# Altium PCB higgsant.PcbDoc
Units mil, origin at the board's own origin, x right, y up, seen from the top; angles counter-clockwise.
Board outline 7874.02 x 7874.02 mil, 2 copper layers (Top Layer, Bottom Layer), stack 47.8 mil thick; 12 components, 2 nets, 20 pads, 0 vias.
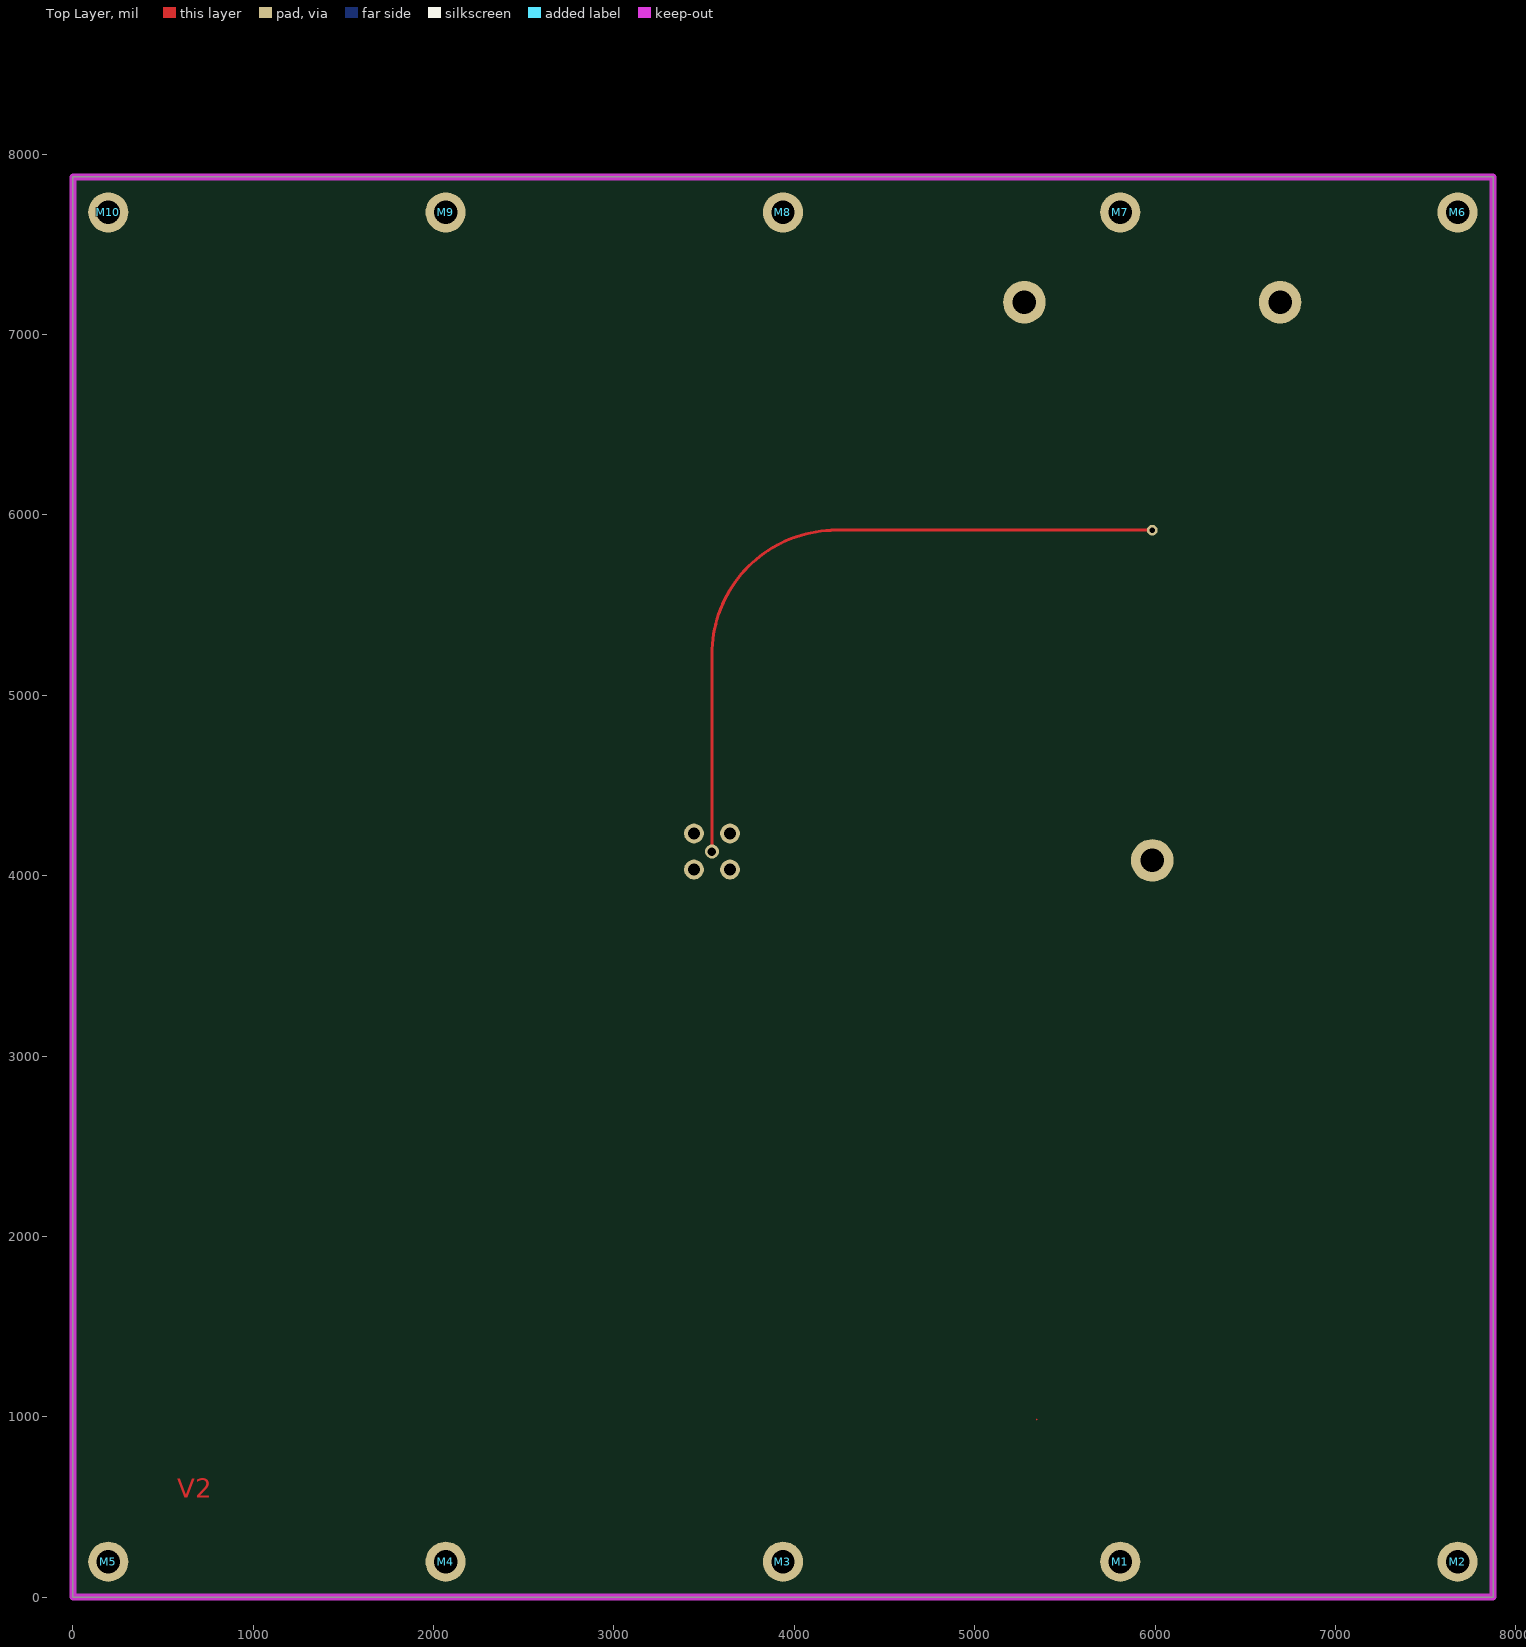
[diagram p0: Top Layer view]
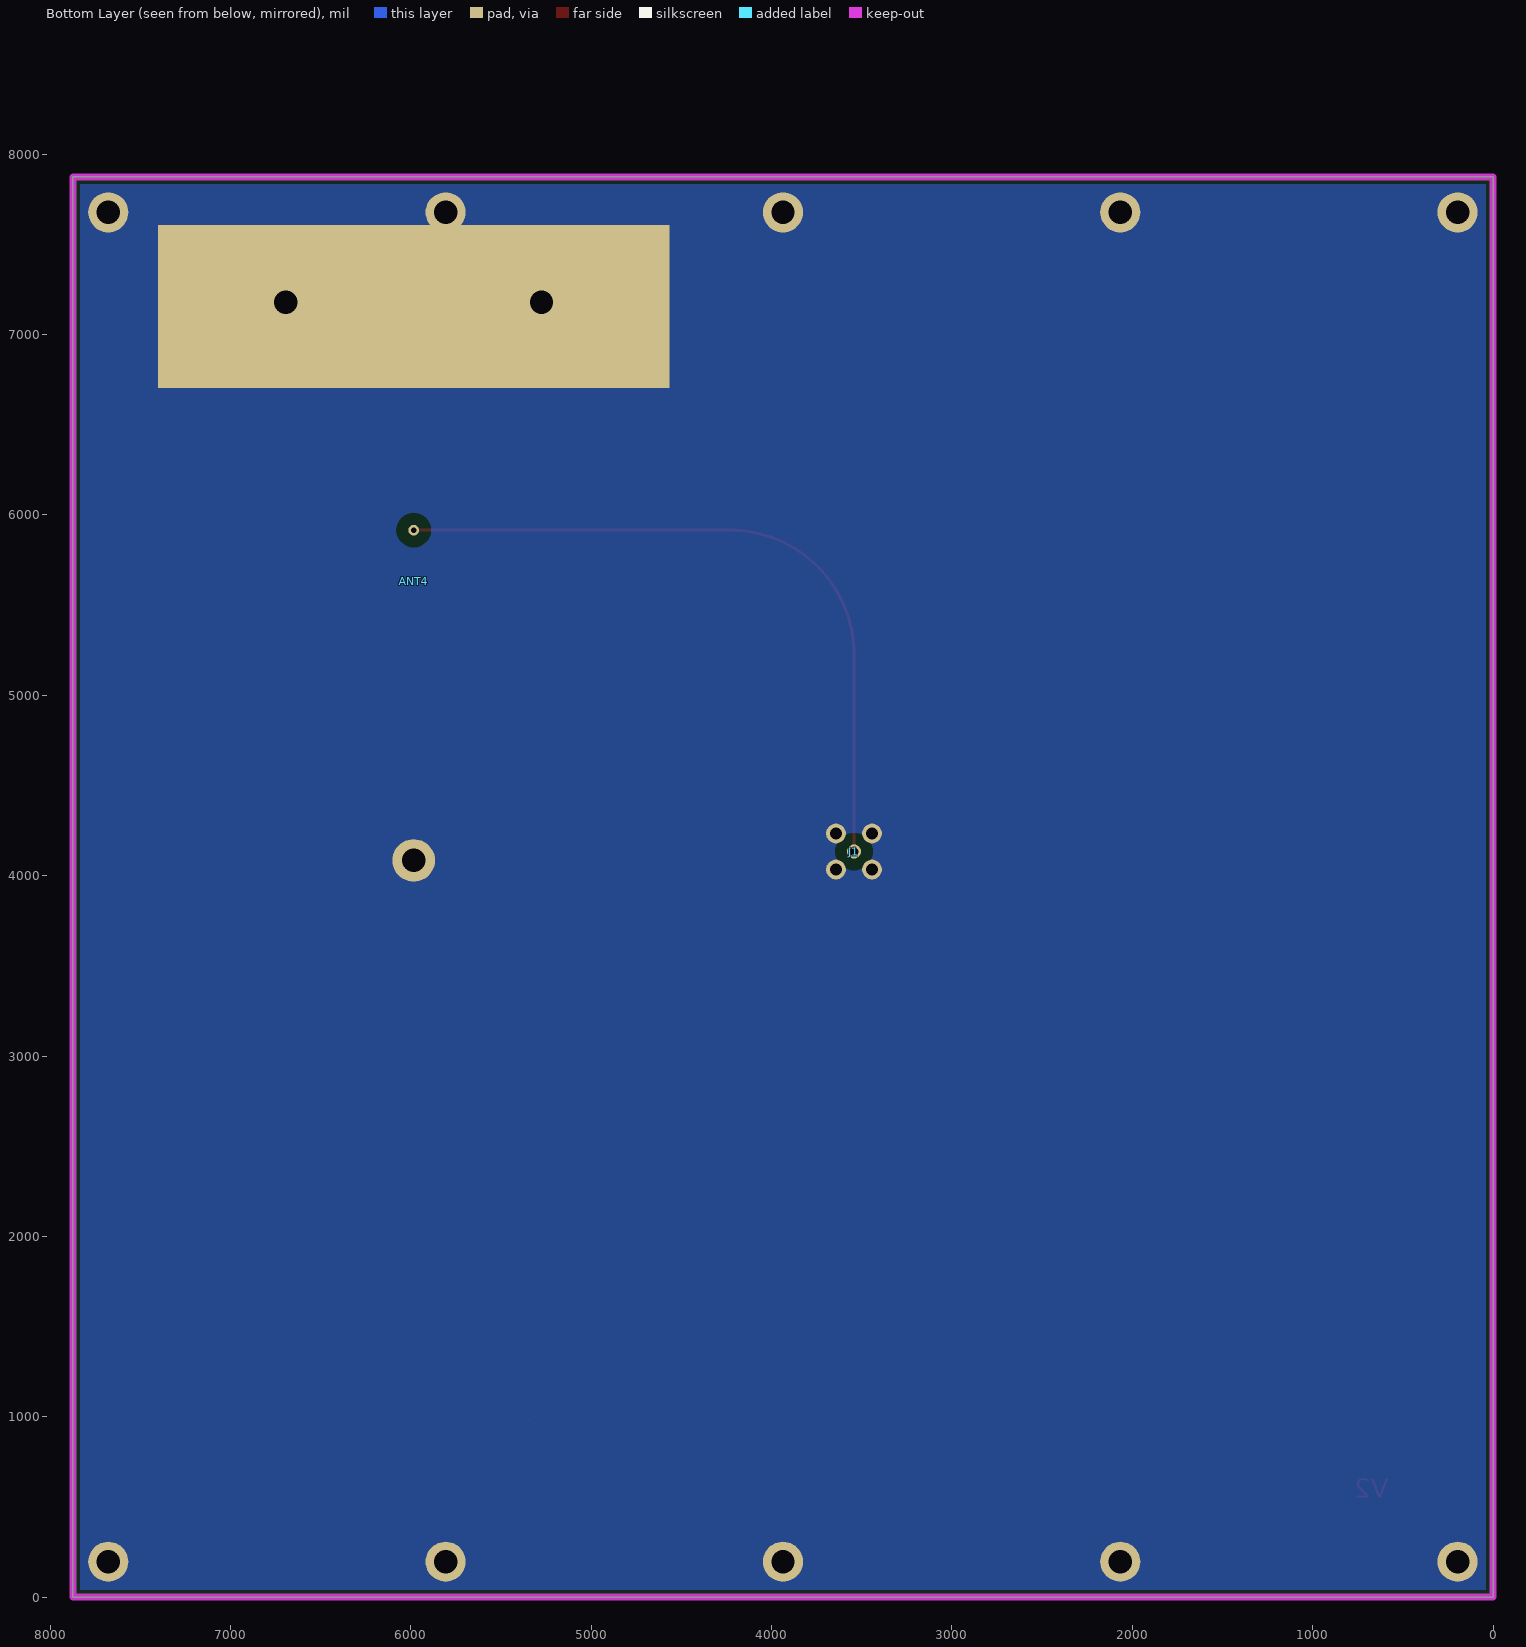
[diagram p1: Bottom Layer view, seen from below]

## Layer stack, top to bottom
Top Solder: solder mask 0.4, Solder Resist, Dk 3.5
Top Layer: signal copper 1.4
Dielectric1: core 45, FR-4, Dk 4.8
Bottom Layer: signal copper 1.4
Bottom Solder: solder mask 0.4, Solder Resist, Dk 3.5

## Board outline
0,0 7874.02,0 7874.02,7874.02 0,7874.02

## Design rules (kind name [scope] priority, off if disabled: settings)
Clearance "Stitching NetANT2_2" [IsStitchingVia and InNet('NetANT2_2') vs (IsVia and (Not IsStitchingVia)) Or IsPad] p1: gap=98.43 ignorepadtopadclearanceinfootprint=FALSE
Clearance [All] p2: gap=20 ignorepadtopadclearanceinfootprint=FALSE except(0: Arc-Text Track-Text SMDPad-Text THPad-Text Via-Text Fill-Text Poly-Text Region-Text Text-Text; 80: Fill-Hole Poly-Hole Region-Hole)
ComponentClearance [All] p1 off: gap=10 collisioncheckmode=3 verticalgap=10 showdistances=FALSE
HoleSize [All] p1: absolutevalues=TRUE maxlimit=1000 minlimit=10 maxpercent=80.000 minpercent=20.000
PlaneConnect [All] p1: planeconnectstyle=Direct reliefexpansion=20 reliefentries=4 reliefconductorwidth=10 reliefairgap=10
PolygonConnect [All] p1: connectstyle=Direct reliefconductorwidth=10 reliefentries=4 polygonreliefangle="90 Angle" airgapwidth=10
RoutingVias [All] p1: holewidth=28 width=50 viastyle="Through Hole" minholewidth=28 minwidth=50 maxholewidth=28 maxwidth=50
SilkToSolderMaskClearance SilkscreenOverComponentPads [IsPad] p1: minsilkscreentomaskgap=10 clearancetoexposedcopper=TRUE
SolderMaskExpansion [All] p1: expansion=4
Width [All] p1: maxlimit=19685.04 minlimit=3.5 preferedwidth=3.5
26 further rules are at their usual default settings.

## Components (designator, comment, footprint, x,y, rotation, side; value= is the part's Value field where it differs from the comment)
ANT4 "antenna_plane" antenna_plane 5984.25,5748.03 r90 bottom
J1 "142146" 142146 3543.31,4133.86 r0 bottom
M1 "MOUNT" MOUNTM3 5807.09,196.85 r0 top
M2 "MOUNT" MOUNTM3 7677.17,196.85 r0 top
M3 "MOUNT" MOUNTM3 3937.01,196.85 r0 top
M4 "MOUNT" MOUNTM3 2066.93,196.85 r0 top
M5 "MOUNT" MOUNTM3 196.85,196.85 r0 top
M6 "MOUNT" MOUNTM3 7677.17,7677.17 r0 top
M7 "MOUNT" MOUNTM3 5807.09,7677.17 r0 top
M8 "MOUNT" MOUNTM3 3937.01,7677.17 r0 top
M9 "MOUNT" MOUNTM3 2066.93,7677.17 r0 top
M10 "MOUNT" MOUNTM3 196.85,7677.17 r0 top

## Footprints (in the part's own frame and the unit in brackets; to place one, negate y for a bottom-side part, rotate by r counter-clockwise, add the part's x,y. Pads: shape width x height; smd on the part's side, far side on the other; paste and mask are expansions set on the pad)
142146 [mm] "Connector; RF Coaxial, SMB, Thru-Hole; 5 Position; Right-Angle"
  round 2 / inner round 0 / far side round 2 hole 1.2: 1(0,0)
  round 2.8 hole 1.7: 2(-2.54,-2.54) 3(2.54,-2.54) 4(2.54,2.54) 5(-2.54,2.54)
  body extent -10.6,-3.5 3.5,3.5, height 9.06
antenna_plane [mm] "sheetmetal antenna plane"
  round 6 hole 3.3 paste-1.5: 1(-42.25,0) 1(36.35,-18)
  rect 23x72 smd paste-11.5: 1(35.75,0)
  round 6 hole 3.3 paste-1.5 mask+3: 1(36.35,18)
  round 1.524 / inner round 0 / far side round 1.524 hole 0.762: 2(4.25,0)
  body extent -47.25,-36 47.25,36, height 10.9
MOUNTM3 [mm] "M3 Mounting Hole"
  round 5.65 hole 3.3: 1(0,0)

## Part data
ANT4: Manufacturer=Siglabs, Manufacturer P/N=antenna_plane
J1: library part COAX-F, "Connector; RF Coaxial, SMB, Thru-Hole; 5 Position; Right-Angle", Manufacturer="Amphenol RF", Manufacturer P/N=142146
M1 M2 M3 M4 M5 M6 M7 M8 M9 M10: "M3 Standard Fit Hole"

## Nets (pads, with @x,y where several pads share a name; then routed paths per layer and width w, separated by ;. In a path a pad name is that pad's centre, name@x,y a point inside that pad or via, vN(x,y) a via of type N, cw(c..) or ccw(c..) an arc to the next point about the centre after c; other vN are vias at no path point)
GND: ANT4.1 J1.2 J1.3 J1.4 J1.5 M1.1 M2.1 M3.1 M4.1 M5.1 M6.1 M7.1 M8.1 M9.1 M10.1
NetANT4_2: ANT4.2 J1.1 | length 3926.8
  Top Layer w17: J1.1 3543.31,5226.55 cw(c4232.11,5226.55) 4232.11,5915.35 ANT4.2
copper on no net: | length 2.9
  Top Layer w8.75: 5344.49,984.25 5344.49,987.13

## Polygon pours and split planes (outlines as drawn)
no net on Mechanical 16 "NONET_L-01_P-001" (solid): 2854.72,-1103.22 2861.72,-1093.6 2866.97,-1083.97 2871.35,-1073.47 2874.85,-1062.97 2877.47,-1051.6 2878.35,-1040.22 2879.22,-1027.97 2878.35,-1015.72 2877.47,-1003.47 2874.85,-992.1 2871.35,-980.72 2866.97,-971.1 2861.72,-961.47 2855.6,-951.85 2848.6,-943.1 2840.72,-935.22 2832.85,-929.1 2824.1,-922.97 2814.47,-918.6 2805.72,-915.1 2795.22,-912.47 2784.72,-910.72 2764.6,-910.72 2754.97,-912.47 2745.35,-914.22 2736.6,-917.72 2727.85,-922.1 2719.97,-927.35 2712.1,-933.47 2704.22,-940.47 2704.22,-915.97 2648.22,-915.97 2648.22,-1139.1 2704.22,-1139.1 2704.22,-1115.47 2712.1,-1122.47 2720.85,-1129.47 2728.72,-1133.85 2737.47,-1138.22 2745.35,-1140.85 2754.1,-1143.47 2763.72,-1144.35 2772.47,-1145.22 2783.85,-1144.35 2793.47,-1142.6 2803.97,-1139.97 2812.72,-1136.47 2822.35,-1132.1 2831.1,-1125.97 2839.85,-1118.97 2847.72,-1111.1
no net on Mechanical 16 "NONET_L-01_P-001" (solid): 2901.97,-1338.6 2905.47,-1334.22 2908.1,-1328.97 2910.72,-1324.6 2912.47,-1319.35 2914.22,-1314.1 2914.22,-1307.97 2915.1,-1302.72 2914.22,-1295.72 2913.35,-1290.47 2912.47,-1284.35 2909.85,-1279.1 2907.22,-1273.85 2904.6,-1268.6 2900.22,-1264.22 2895.85,-1259.85 2887.97,-1253.72 2878.35,-1248.47 2868.72,-1245.85 2858.22,-1244.97 2851.22,-1245.85 2843.35,-1246.72 2836.35,-1249.35 2829.35,-1252.85 2823.22,-1257.22 2817.1,-1261.6 2812.72,-1267.72 2808.35,-1273.85 2804.85,-1280.85 2803.1,-1287.85 2801.35,-1294.85 2800.47,-1301.85 2801.35,-1309.72 2803.1,-1316.72 2804.85,-1323.72 2808.35,-1330.72 2812.72,-1337.72 2817.1,-1342.97 2823.22,-1347.35 2829.35,-1351.72 2836.35,-1355.22 2843.35,-1357.85 2850.35,-1358.72 2858.22,-1359.6 2864.35,-1359.6 2869.6,-1358.72 2874.85,-1356.97 2880.1,-1355.22 2885.35,-1352.6 2889.72,-1349.97 2894.1,-1346.47 2898.47,-1342.97
no net on Mechanical 16 "NONET_L-01_P-001" (solid): 3099.72,-1338.6 3102.35,-1334.22 3104.97,-1329.85 3107.6,-1324.6 3109.35,-1319.35 3110.22,-1314.1 3111.1,-1302.72 3110.22,-1290.47 3107.6,-1279.97 3104.97,-1274.72 3103.22,-1269.47 3099.72,-1265.1 3096.22,-1261.6 3088.35,-1253.72 3083.97,-1251.1 3079.6,-1249.35 3075.22,-1247.6 3069.97,-1245.85 3060.35,-1244.97 3050.72,-1245.85 3041.97,-1248.47 3033.22,-1253.72 3026.22,-1259.85 3026.22,-1247.6 2998.22,-1247.6 2998.22,-1356.97 3026.22,-1356.97 3026.22,-1345.6 3034.1,-1351.72 3041.97,-1356.1 3050.72,-1358.72 3059.47,-1359.6 3064.72,-1359.6 3069.1,-1358.72 3074.35,-1356.97 3078.72,-1355.22 3083.1,-1353.47 3087.47,-1349.97 3096.22,-1342.97
no net on Mechanical 16 "NONET_L-01_P-001" (solid): 3295.72,-1338.6 3298.35,-1334.22 3301.85,-1328.97 3303.6,-1324.6 3305.35,-1319.35 3307.1,-1314.1 3307.97,-1307.97 3307.97,-1295.72 3307.1,-1290.47 3305.35,-1284.35 3303.6,-1279.1 3300.97,-1273.85 3297.47,-1268.6 3293.97,-1264.22 3289.6,-1259.85 3280.85,-1253.72 3272.1,-1248.47 3261.6,-1245.85 3251.97,-1244.97 3244.1,-1245.85 3237.1,-1246.72 3229.22,-1249.35 3223.1,-1252.85 3216.1,-1257.22 3210.85,-1261.6 3205.6,-1267.72 3201.22,-1273.85 3198.6,-1280.85 3195.97,-1287.85 3194.22,-1294.85 3194.22,-1309.72 3195.97,-1316.72 3198.6,-1323.72 3201.22,-1330.72 3205.6,-1337.72 3210.85,-1342.97 3216.1,-1347.35 3222.22,-1351.72 3229.22,-1355.22 3236.22,-1357.85 3244.1,-1358.72 3251.97,-1359.6 3257.22,-1359.6 3262.47,-1358.72 3267.72,-1356.97 3272.97,-1355.22 3278.22,-1352.6 3282.6,-1349.97 3286.97,-1346.47 3291.35,-1342.97
no net on Mechanical 16 "NONET_L-01_P-001" (solid): 3411.22,-1356.97 3411.22,-1345.6 3402.47,-1351.72 3394.6,-1356.1 3386.72,-1358.72 3377.1,-1359.6 3371.85,-1359.6 3366.6,-1358.72 3362.22,-1356.97 3357.85,-1355.22 3353.47,-1353.47 3349.1,-1349.97 3340.35,-1342.97 3336.85,-1338.6 3334.22,-1334.22 3331.6,-1329.85 3328.97,-1324.6 3327.22,-1319.35 3326.35,-1314.1 3325.47,-1302.72 3326.35,-1290.47 3328.97,-1279.97 3330.72,-1274.72 3333.35,-1269.47 3336.85,-1265.1 3340.35,-1261.6 3348.22,-1253.72 3352.6,-1251.1 3356.97,-1249.35 3361.35,-1247.6 3366.6,-1245.85 3376.22,-1244.97 3385.85,-1245.85 3394.6,-1248.47 3403.35,-1253.72 3411.22,-1259.85 3411.22,-1205.6 3437.47,-1205.6 3437.47,-1356.97
no net on Mechanical 16 "NONET_L-01_P-001" (solid): 3566.1,-1338.6 3569.6,-1334.22 3572.22,-1329.85 3573.97,-1324.6 3575.72,-1319.35 3577.47,-1314.1 3578.35,-1302.72 3577.47,-1290.47 3573.97,-1279.97 3572.22,-1274.72 3569.6,-1269.47 3566.97,-1265.1 3563.47,-1261.6 3555.6,-1253.72 3551.22,-1251.1 3546.85,-1249.35 3542.47,-1247.6 3537.22,-1245.85 3526.72,-1244.97 3517.97,-1245.85 3508.35,-1248.47 3500.47,-1253.72 3492.6,-1259.85 3492.6,-1247.6 3465.47,-1247.6 3465.47,-1356.97 3492.6,-1356.97 3492.6,-1345.6 3500.47,-1351.72 3509.22,-1356.1 3517.1,-1358.72 3525.85,-1359.6 3531.1,-1359.6 3536.35,-1358.72 3541.6,-1356.97 3545.97,-1355.22 3550.35,-1353.47 3554.72,-1349.97 3562.6,-1342.97
no net on Mechanical 16 "NONET_L-01_P-001" (solid): 3392.85,-1186.35 3398.97,-1176.72 3404.22,-1166.22 3407.72,-1155.72 3346.47,-1155.72 3342.1,-1160.1 3336.85,-1163.6 3331.6,-1167.1 3325.47,-1169.72 3318.47,-1172.35 3311.47,-1173.22 3302.72,-1174.1 3294.85,-1174.97 3283.47,-1174.1 3273.85,-1173.22 3265.97,-1170.6 3258.1,-1167.97 3251.97,-1163.6 3246.72,-1160.1 3242.35,-1154.85 3238.85,-1149.6 3236.22,-1143.47 3234.47,-1134.72 3233.6,-1124.22 3233.6,-1111.97 3240.6,-1118.1 3248.47,-1124.22 3256.35,-1128.6 3264.22,-1132.97 3272.97,-1135.6 3281.72,-1137.35 3291.35,-1139.1 3312.35,-1139.1 3322.85,-1137.35 3332.47,-1134.72 3342.1,-1131.22 3351.72,-1126.85 3360.47,-1120.72 3369.22,-1114.6 3377.1,-1106.72 3384.1,-1098.85 3390.22,-1089.22 3395.47,-1080.47 3399.85,-1069.97 3403.35,-1059.47 3405.97,-1048.97 3407.72,-1036.72 3407.72,-1012.22 3405.97,-999.97 3403.35,-987.72 3399.85,-977.22 3394.6,-966.72 3389.35,-957.1 3382.35,-947.47 3375.35,-939.6 3367.47,-932.6 3359.6,-926.47 3350.85,-922.1 3342.1,-917.72 3333.35,-914.22 3323.72,-912.47 3314.1,-910.72 3294.85,-910.72 3285.22,-912.47 3276.47,-914.22 3267.72,-917.72 3258.97,-921.22 3250.22,-926.47 3241.47,-933.47 3233.6,-940.47 3233.6,-915.97 3177.6,-915.97 3177.6,-1120.72 3179.35,-1133.85 3181.1,-1145.22 3182.85,-1156.6 3186.35,-1166.22 3190.72,-1174.97 3195.1,-1183.72 3200.35,-1190.72 3208.22,-1198.6 3217.85,-1206.47 3227.47,-1212.6 3238.85,-1217.85 3250.22,-1221.35 3263.35,-1223.97 3277.35,-1225.72 3292.22,-1226.6 3307.97,-1225.72 3322.85,-1224.85 3335.97,-1222.22 3347.35,-1218.72 3357.85,-1213.47 3368.35,-1208.22 3377.1,-1202.1 3384.97,-1194.22
no net on Mechanical 16 "NONET_L-01_P-001" (solid): 2656.97,-1339.47 2659.6,-1335.1 2663.1,-1329.85 2664.85,-1325.47 2666.6,-1320.22 2668.35,-1314.1 2669.22,-1302.72 2668.35,-1291.35 2666.6,-1285.22 2664.85,-1279.97 2663.1,-1274.72 2660.47,-1270.35 2656.97,-1265.97 2652.6,-1261.6 2649.1,-1258.1 2644.72,-1254.6 2639.47,-1251.1 2635.1,-1249.35 2629.85,-1247.6 2624.6,-1245.85 2618.47,-1244.97 2606.22,-1244.97 2600.97,-1245.85 2594.85,-1247.6 2589.6,-1249.35 2584.35,-1251.1 2579.97,-1254.6 2575.6,-1258.1 2571.22,-1261.6 2566.85,-1265.97 2564.22,-1270.35 2561.6,-1275.6 2558.97,-1280.85 2557.22,-1286.1 2556.35,-1292.22 2555.47,-1298.35 2554.6,-1305.35 2554.6,-1310.6 2642.97,-1310.6 2641.22,-1315.85 2639.47,-1320.22 2635.97,-1324.6 2632.47,-1328.97 2628.1,-1331.6 2622.85,-1333.35 2617.6,-1335.1 2604.47,-1335.1 2597.47,-1332.47 2591.35,-1329.85 2585.22,-1324.6 2562.47,-1335.97 2566.85,-1341.22 2571.22,-1346.47 2577.35,-1349.97 2582.6,-1353.47 2588.72,-1356.1 2595.72,-1357.85 2603.6,-1358.72 2611.47,-1359.6 2617.6,-1359.6 2623.72,-1358.72 2628.97,-1356.97 2634.22,-1355.22 2639.47,-1353.47 2644.72,-1349.97 2649.1,-1347.35 2652.6,-1342.97
no net on Mechanical 16 "NONET_L-01_P-001" (solid): 9776.1,-1339.47 9773.47,-1335.1 9769.97,-1329.85 9768.22,-1325.47 9766.47,-1320.22 9764.72,-1314.1 9763.85,-1302.72 9764.72,-1291.35 9766.47,-1285.22 9768.22,-1279.97 9769.97,-1274.72 9772.6,-1270.35 9776.1,-1265.97 9780.47,-1261.6 9783.97,-1258.1 9788.35,-1254.6 9793.6,-1251.1 9797.97,-1249.35 9803.22,-1247.6 9808.47,-1245.85 9814.6,-1244.97 9826.85,-1244.97 9832.1,-1245.85 9838.22,-1247.6 9843.47,-1249.35 9848.72,-1251.1 9853.1,-1254.6 9857.47,-1258.1 9861.85,-1261.6 9866.22,-1265.97 9868.85,-1270.35 9871.47,-1275.6 9874.1,-1280.85 9875.85,-1286.1 9876.72,-1292.22 9877.6,-1298.35 9878.47,-1305.35 9878.47,-1310.6 9790.1,-1310.6 9791.85,-1315.85 9793.6,-1320.22 9797.1,-1324.6 9800.6,-1328.97 9804.97,-1331.6 9810.22,-1333.35 9815.47,-1335.1 9828.6,-1335.1 9835.6,-1332.47 9841.72,-1329.85 9847.85,-1324.6 9870.6,-1335.97 9866.22,-1341.22 9861.85,-1346.47 9855.72,-1349.97 9850.47,-1353.47 9844.35,-1356.1 9837.35,-1357.85 9829.47,-1358.72 9821.6,-1359.6 9815.47,-1359.6 9809.35,-1358.72 9804.1,-1356.97 9798.85,-1355.22 9793.6,-1353.47 9788.35,-1349.97 9783.97,-1347.35 9780.47,-1342.97
no net on Mechanical 16 "NONET_L-01_P-001" (solid): 9040.22,-1186.35 9034.1,-1176.72 9028.85,-1166.22 9025.35,-1155.72 9086.6,-1155.72 9090.97,-1160.1 9096.22,-1163.6 9101.47,-1167.1 9107.6,-1169.72 9114.6,-1172.35 9121.6,-1173.22 9130.35,-1174.1 9138.22,-1174.97 9149.6,-1174.1 9159.22,-1173.22 9167.1,-1170.6 9174.97,-1167.97 9181.1,-1163.6 9186.35,-1160.1 9190.72,-1154.85 9194.22,-1149.6 9196.85,-1143.47 9198.6,-1134.72 9199.47,-1124.22 9199.47,-1111.97 9192.47,-1118.1 9184.6,-1124.22 9176.72,-1128.6 9168.85,-1132.97 9160.1,-1135.6 9151.35,-1137.35 9141.72,-1139.1 9120.72,-1139.1 9110.22,-1137.35 9100.6,-1134.72 9090.97,-1131.22 9081.35,-1126.85 9072.6,-1120.72 9063.85,-1114.6 9055.97,-1106.72 9048.97,-1098.85 9042.85,-1089.22 9037.6,-1080.47 9033.22,-1069.97 9029.72,-1059.47 9027.1,-1048.97 9025.35,-1036.72 9025.35,-1012.22 9027.1,-999.97 9029.72,-987.72 9033.22,-977.22 9038.47,-966.72 9043.72,-957.1 9050.72,-947.47 9057.72,-939.6 9065.6,-932.6 9073.47,-926.47 9082.22,-922.1 9090.97,-917.72 9099.72,-914.22 9109.35,-912.47 9118.97,-910.72 9138.22,-910.72 9147.85,-912.47 9156.6,-914.22 9165.35,-917.72 9174.1,-921.22 9182.85,-926.47 9191.6,-933.47 9199.47,-940.47 9199.47,-915.97 9255.47,-915.97 9255.47,-1120.72 9253.72,-1133.85 9251.97,-1145.22 9250.22,-1156.6 9246.72,-1166.22 9242.35,-1174.97 9237.97,-1183.72 9232.72,-1190.72 9224.85,-1198.6 9215.22,-1206.47 9205.6,-1212.6 9194.22,-1217.85 9182.85,-1221.35 9169.72,-1223.97 9155.72,-1225.72 9140.85,-1226.6 9125.1,-1225.72 9110.22,-1224.85 9097.1,-1222.22 9085.72,-1218.72 9075.22,-1213.47 9064.72,-1208.22 9055.97,-1202.1 9048.1,-1194.22
no net on Mechanical 16 "NONET_L-01_P-001" (solid): 8866.97,-1338.6 8863.47,-1334.22 8860.85,-1329.85 8859.1,-1324.6 8857.35,-1319.35 8855.6,-1314.1 8854.72,-1302.72 8855.6,-1290.47 8859.1,-1279.97 8860.85,-1274.72 8863.47,-1269.47 8866.1,-1265.1 8869.6,-1261.6 8877.47,-1253.72 8881.85,-1251.1 8886.22,-1249.35 8890.6,-1247.6 8895.85,-1245.85 8906.35,-1244.97 8915.1,-1245.85 8924.72,-1248.47 8932.6,-1253.72 8940.47,-1259.85 8940.47,-1247.6 8967.6,-1247.6 8967.6,-1356.97 8940.47,-1356.97 8940.47,-1345.6 8932.6,-1351.72 8923.85,-1356.1 8915.97,-1358.72 8907.22,-1359.6 8901.97,-1359.6 8896.72,-1358.72 8891.47,-1356.97 8887.1,-1355.22 8882.72,-1353.47 8878.35,-1349.97 8870.47,-1342.97
no net on Mechanical 16 "NONET_L-01_P-001" (solid): 9021.85,-1356.97 9021.85,-1345.6 9030.6,-1351.72 9038.47,-1356.1 9046.35,-1358.72 9055.97,-1359.6 9061.22,-1359.6 9066.47,-1358.72 9070.85,-1356.97 9075.22,-1355.22 9079.6,-1353.47 9083.97,-1349.97 9092.72,-1342.97 9096.22,-1338.6 9098.85,-1334.22 9101.47,-1329.85 9104.1,-1324.6 9105.85,-1319.35 9106.72,-1314.1 9107.6,-1302.72 9106.72,-1290.47 9104.1,-1279.97 9102.35,-1274.72 9099.72,-1269.47 9096.22,-1265.1 9092.72,-1261.6 9084.85,-1253.72 9080.47,-1251.1 9076.1,-1249.35 9071.72,-1247.6 9066.47,-1245.85 9056.85,-1244.97 9047.22,-1245.85 9038.47,-1248.47 9029.72,-1253.72 9021.85,-1259.85 9021.85,-1205.6 8995.6,-1205.6 8995.6,-1356.97
no net on Mechanical 16 "NONET_L-01_P-001" (solid): 9137.35,-1338.6 9134.72,-1334.22 9131.22,-1328.97 9129.47,-1324.6 9127.72,-1319.35 9125.97,-1314.1 9125.1,-1307.97 9125.1,-1295.72 9125.97,-1290.47 9127.72,-1284.35 9129.47,-1279.1 9132.1,-1273.85 9135.6,-1268.6 9139.1,-1264.22 9143.47,-1259.85 9152.22,-1253.72 9160.97,-1248.47 9171.47,-1245.85 9181.1,-1244.97 9188.97,-1245.85 9195.97,-1246.72 9203.85,-1249.35 9209.97,-1252.85 9216.97,-1257.22 9222.22,-1261.6 9227.47,-1267.72 9231.85,-1273.85 9234.47,-1280.85 9237.1,-1287.85 9238.85,-1294.85 9238.85,-1309.72 9237.1,-1316.72 9234.47,-1323.72 9231.85,-1330.72 9227.47,-1337.72 9222.22,-1342.97 9216.97,-1347.35 9210.85,-1351.72 9203.85,-1355.22 9196.85,-1357.85 9188.97,-1358.72 9181.1,-1359.6 9175.85,-1359.6 9170.6,-1358.72 9165.35,-1356.97 9160.1,-1355.22 9154.85,-1352.6 9150.47,-1349.97 9146.1,-1346.47 9141.72,-1342.97
no net on Mechanical 16 "NONET_L-01_P-001" (solid): 9333.35,-1338.6 9330.72,-1334.22 9328.1,-1329.85 9325.47,-1324.6 9323.72,-1319.35 9322.85,-1314.1 9321.97,-1302.72 9322.85,-1290.47 9325.47,-1279.97 9328.1,-1274.72 9329.85,-1269.47 9333.35,-1265.1 9336.85,-1261.6 9344.72,-1253.72 9349.1,-1251.1 9353.47,-1249.35 9357.85,-1247.6 9363.1,-1245.85 9372.72,-1244.97 9382.35,-1245.85 9391.1,-1248.47 9399.85,-1253.72 9406.85,-1259.85 9406.85,-1247.6 9434.85,-1247.6 9434.85,-1356.97 9406.85,-1356.97 9406.85,-1345.6 9398.97,-1351.72 9391.1,-1356.1 9382.35,-1358.72 9373.6,-1359.6 9368.35,-1359.6 9363.97,-1358.72 9358.72,-1356.97 9354.35,-1355.22 9349.97,-1353.47 9345.6,-1349.97 9336.85,-1342.97
no net on Mechanical 16 "NONET_L-01_P-001" (solid): 9531.1,-1338.6 9527.6,-1334.22 9524.97,-1328.97 9522.35,-1324.6 9520.6,-1319.35 9518.85,-1314.1 9518.85,-1307.97 9517.97,-1302.72 9518.85,-1295.72 9519.72,-1290.47 9520.6,-1284.35 9523.22,-1279.1 9525.85,-1273.85 9528.47,-1268.6 9532.85,-1264.22 9537.22,-1259.85 9545.1,-1253.72 9554.72,-1248.47 9564.35,-1245.85 9574.85,-1244.97 9581.85,-1245.85 9589.72,-1246.72 9596.72,-1249.35 9603.72,-1252.85 9609.85,-1257.22 9615.97,-1261.6 9620.35,-1267.72 9624.72,-1273.85 9628.22,-1280.85 9629.97,-1287.85 9631.72,-1294.85 9632.6,-1301.85 9631.72,-1309.72 9629.97,-1316.72 9628.22,-1323.72 9624.72,-1330.72 9620.35,-1337.72 9615.97,-1342.97 9609.85,-1347.35 9603.72,-1351.72 9596.72,-1355.22 9589.72,-1357.85 9582.72,-1358.72 9574.85,-1359.6 9568.72,-1359.6 9563.47,-1358.72 9558.22,-1356.97 9552.97,-1355.22 9547.72,-1352.6 9543.35,-1349.97 9538.97,-1346.47 9534.6,-1342.97
no net on Mechanical 16 "NONET_L-01_P-001" (solid): 9578.35,-1103.22 9571.35,-1093.6 9566.1,-1083.97 9561.72,-1073.47 9558.22,-1062.97 9555.6,-1051.6 9554.72,-1040.22 9553.85,-1027.97 9554.72,-1015.72 9555.6,-1003.47 9558.22,-992.1 9561.72,-980.72 9566.1,-971.1 9571.35,-961.47 9577.47,-951.85 9584.47,-943.1 9592.35,-935.22 9600.22,-929.1 9608.97,-922.97 9618.6,-918.6 9627.35,-915.1 9637.85,-912.47 9648.35,-910.72 9668.47,-910.72 9678.1,-912.47 9687.72,-914.22 9696.47,-917.72 9705.22,-922.1 9713.1,-927.35 9720.97,-933.47 9728.85,-940.47 9728.85,-915.97 9784.85,-915.97 9784.85,-1139.1 9728.85,-1139.1 9728.85,-1115.47 9720.97,-1122.47 9712.22,-1129.47 9704.35,-1133.85 9695.6,-1138.22 9687.72,-1140.85 9678.97,-1143.47 9669.35,-1144.35 9660.6,-1145.22 9649.22,-1144.35 9639.6,-1142.6 9629.1,-1139.97 9620.35,-1136.47 9610.72,-1132.1 9601.97,-1125.97 9593.22,-1118.97 9585.35,-1111.1
GND on Bottom Layer "BOT-GND" (solid, pour order 0): 0,0 7874.02,0 7874.02,7874.02 0,7874.02

## Keep-outs
Keep-Out Layer:
  the board outline again, w39.37

## Other copper
Top Layer:
  text "V2" at 578.74,515.75 h180

## Silkscreen, mask and mechanical layers (free items; w line width, h text height)
Top Solder:
  rectangle: 0,0 7874.02,7874.02
Bottom Solder:
  rectangle: 0,0 7874.02,7874.02
Mechanical 2:
  the board outline again, w39.37
Mechanical 15:
  lines w7.87: 4104.33,7322.83 7824.8,7322.83
Mechanical 16:
  drawing of 82 lines, arcs and shapes, not listed
  text "1" at -932.13,9211.46 h70
  text "2" at 1818.54,9211.46 h70
  text "3" at 4563.54,9211.46 h70
  text "4" at 7314.55,9211.46 h70
  text "5" at 10064.55,9211.46 h70
  text "6" at 12814.55,9211.46 h70
  text "REV" at 10066.54,8996.46 h66.93
  text "DATE" at 10666.54,8996.46 h66.93
  text "DESC" at 11166.54,8996.46 h66.93
  text "ENG" at 13966.54,8996.46 h66.93
  text "1" at 10066.54,8796.46 h66.93
  text "5/28/17" at 10666.54,8796.46 h66.93
  text "INITIAL RELEASE" at 11166.54,8796.46 h66.93
  text "J. Brinton" at 13966.54,8796.46 h66.93
  text "2" at 10066.54,8596.46 h66.93
  text "10/20/17" at 10666.54,8596.46 h66.93
  text "REMOVED ALL BUT ONE PATCH" at 11166.54,8596.46 h66.93
  text "J. Brinton" at 13966.54,8596.46 h66.93
  text "A" at -2208.46,7818.46 h70
  text "A" at 14591.54,7818.46 h70
  text "B" at -2208.46,5693.46 h70
  text "B" at 14591.54,5693.46 h70
  text "C" at -2208.46,3568.46 h70
  text "C" at 14591.54,3568.46 h70
  text "D" at -2208.46,1443.46 h70
  text "D" at 14591.54,1443.46 h70
  text "ENGINEER:" at 10066.54,-353.54 h45
  text "TITLE:" at 11566.54,-353.54 h45
  text "ALL DIMENSIONS ARE IN MILS (MM)" at 7291.54,-428.54 h47.24
  text "Signal Laboratories, Inc." at 8691.54,-428.54 h70
  text "J. Brinton" at 10066.54,-478.54 h70
  text "3479 Edison Way" at 8691.54,-528.54 h70
  text "TOLERANCES:" at 7726.54,-593.54 h47.24
  text "Menlo Park CA 94025" at 8691.54,-628.54 h70
  text "Higgs Antenna" at 11591.54,-628.54 h86.61
  text "PCB DESIGNER:" at 10066.54,-648.54 h45
  text "E" at -2208.46,-676.54 h70
  text "E" at 14591.54,-676.54 h70
  text "DECIMALS" at 7291.54,-703.54 h47.24
  text "(877) 778-8435" at 8691.54,-728.54 h70
  text "J. Brinton" at 10066.54,-778.54 h70
  text ".X     0.1" at 7291.54,-828.54 h47.24
  text ".XX    0.05" at 7291.54,-928.54 h47.24
  text "DATE:" at 10066.54,-953.54 h45
  text "PART NO.:" at 11566.54,-953.54 h45
  text "REV:" at 13666.54,-953.54 h45
  text ".XXX   0.005" at 7291.54,-1028.54 h47.24
  text "10/20/2017" at 10066.54,-1078.54 h66.93
  text "-" at 11566.54,-1078.54 h70
  text "2" at 13666.54,-1078.54 h70
  text "*UNLESS OTHERWISE NOTED" at 7266.54,-1253.54 h47.24
  text "FILE NAME:" at 10066.54,-1253.54 h45
  text "DWG NO:" at 11566.54,-1253.54 h45
  text "SCALE:" at 13666.54,-1253.54 h45
  text ".PCB_FILE_NAME_NO_PATH" at 10116.54,-1373.54 h70
  text "-" at 11566.54,-1378.54 h70
  text "1:1" at 13666.54,-1378.54 h70
  text "1" at -932.13,-1588.54 h70
  text "2" at 1818.54,-1588.54 h70
  text "3" at 4563.54,-1588.54 h70
  text "4" at 7314.55,-1588.54 h70
Drill Drawing:
  lines w5: 9205.16,5625 9230.16,5637.5 9255.16,5625 9242.66,5650 9255.16,5675 9230.16,5662.5 9205.16,5675 9217.66,5650 9205.16,5625 ; 9205.16,5750 9217.66,5750 9230.16,5737.5 9242.66,5750 9255.16,5750 9242.66,5762.5 9255.16,5775 9242.66,5775 9230.16,5787.5 9217.66,5775 9205.16,5775 9217.66,5762.5 9205.16,5750 ; 9205.16,5900 9255.16,5900 9230.16,5850 9205.16,5900 ; 9205.16,5962.5 9255.16,5962.5 9255.16,6012.5 9205.16,6012.5 9205.16,5962.5
  lines w15: 9161.09,5591.25 11221.05,5591.25 ; 9161.09,6041.25 11221.05,6041.25 ; 9566.25,5478.75 9566.25,6153.75 ; 9958.65,5478.75 9958.65,6153.75 ; 10815.9,5478.75 10815.9,6153.75 ; 9161.09,5478.75 11221.05,5478.75 11221.05,6153.75 9161.09,6153.75 9161.09,5478.75
  text "1. FINISH: ENIG" at 9205.91,6912.6 h45
  text "2. NO SOLDERMASK" at 9205.91,6812.6 h45
  text "3. NO OVERLAY" at 9205.91,6712.6 h45
  text "4. CONTROLLED IMPEDANCE ( 50-Ohm )" at 9205.91,6612.6 h45
  text "Symbol" at 9228.59,6075 h54
  text "Count" at 9600,6075 h54
  text "Hole Size" at 9992.4,6075 h54
  text "Plated" at 10849.65,6075 h54
  text "1" at 9600,5962.5 h45
  text "30.00mil (0.762mm)" at 9992.4,5962.5 h45
  text "PTH" at 10849.65,5962.5 h45
  text "1" at 9600,5850 h45
  text "47.24mil (1.200mm)" at 9992.4,5850 h45
  text "PTH" at 10849.65,5850 h45
  text "4" at 9600,5737.5 h45
  text "66.93mil (1.700mm)" at 9992.4,5737.5 h45
  text "PTH" at 10849.65,5737.5 h45
  text "13" at 9600,5625 h45
  text "129.92mil (3.300mm)" at 9992.4,5625 h45
  text "PTH" at 10849.65,5625 h45
  text "19 Total" at 9600,5512.5 h45
Mechanical 32:
  drawing of 82 lines, arcs and shapes, not listed
  text "6" at -381.48,9211.46 h70
  text "5" at 2368.52,9211.46 h70
  text "4" at 5118.52,9211.46 h70
  text "3" at 7869.54,9211.46 h70
  text "2" at 10614.54,9211.46 h70
  text "1" at 13365.2,9211.46 h70
  text "ENG" at -1533.46,8996.46 h66.93
  text "DESC" at 1266.54,8996.46 h66.93
  text "DATE" at 1766.54,8996.46 h66.93
  text "REV" at 2366.54,8996.46 h66.93
  text "J. Brinton" at -1533.46,8796.46 h66.93
  text "INITIAL RELEASE" at 1266.54,8796.46 h66.93
  text "5/28/17" at 1766.54,8796.46 h66.93
  text "1" at 2366.54,8796.46 h66.93
  text "J. Brinton" at -1533.46,8596.46 h66.93
  text "REMOVED ALL BUT ONE PATCH" at 1266.54,8596.46 h66.93
  text "10/20/17" at 1766.54,8596.46 h66.93
  text "2" at 2366.54,8596.46 h66.93
  text "A" at -2158.46,7818.46 h70
  text "A" at 14641.54,7818.46 h70
  text "B" at -2158.46,5693.46 h70
  text "B" at 14641.54,5693.46 h70
  text "C" at -2158.46,3568.46 h70
  text "C" at 14641.54,3568.46 h70
  text "D" at -2158.46,1443.46 h70
  text "D" at 14641.54,1443.46 h70
  text "TITLE:" at 866.54,-353.54 h45
  text "ENGINEER:" at 2366.54,-353.54 h45
  text "Signal Laboratories, Inc." at 3741.54,-428.54 h70
  text "ALL DIMENSIONS ARE IN MILS (MM)" at 5141.54,-428.54 h47.24
  text "J. Brinton" at 2366.54,-478.54 h70
  text "3479 Edison Way" at 3741.54,-528.54 h70
  text "TOLERANCES:" at 4706.54,-593.54 h47.24
  text "Higgs Antenna" at 841.54,-628.54 h86.61
  text "Menlo Park CA 94025" at 3741.54,-628.54 h70
  text "PCB DESIGNER:" at 2366.54,-648.54 h45
  text "E" at -2158.46,-676.54 h70
  text "E" at 14641.54,-676.54 h70
  text "DECIMALS" at 5141.54,-703.54 h47.24
  text "(877) 778-8435" at 3741.54,-728.54 h70
  text "J. Brinton" at 2366.54,-778.54 h70
  text ".X     0.1" at 5141.54,-828.54 h47.24
  text ".XX    0.05" at 5141.54,-928.54 h47.24
  text "REV:" at -1233.46,-953.54 h45
  text "PART NO.:" at 866.54,-953.54 h45
  text "DATE:" at 2366.54,-953.54 h45
  text ".XXX   0.005" at 5141.54,-1028.54 h47.24
  text "2" at -1233.46,-1078.54 h70
  text "-" at 866.54,-1078.54 h70
  text "10/20/2017" at 2366.54,-1078.54 h66.93
  text "SCALE:" at -1233.46,-1253.54 h45
  text "DWG NO:" at 866.54,-1253.54 h45
  text "FILE NAME:" at 2366.54,-1253.54 h45
  text "*UNLESS OTHERWISE NOTED" at 5166.54,-1253.54 h47.24
  text ".PCB_FILE_NAME_NO_PATH" at 2316.54,-1373.54 h70
  text "1:1" at -1233.46,-1378.54 h70
  text "-" at 866.54,-1378.54 h70
  text "4" at 5118.52,-1588.54 h70
  text "3" at 7869.54,-1588.54 h70
  text "2" at 10614.54,-1588.54 h70
  text "1" at 13365.2,-1588.54 h70

## Dimensions
0,7874.02 to 7874.02,7874.02 on Drill Drawing
7874.02,0 to 7874.02,7874.02 on Drill Drawing